# Altium PCB Dental Sensor - V300.PcbDoc
Units mm, origin at the board's own origin, x right, y up, seen from the top; angles counter-clockwise.
Board outline 53.99 x 13.5 mm, 2 copper layers (Top Layer, Bottom Layer), stack 0.287 mm thick; 15 components, 16 nets, 99 pads, 55 vias.
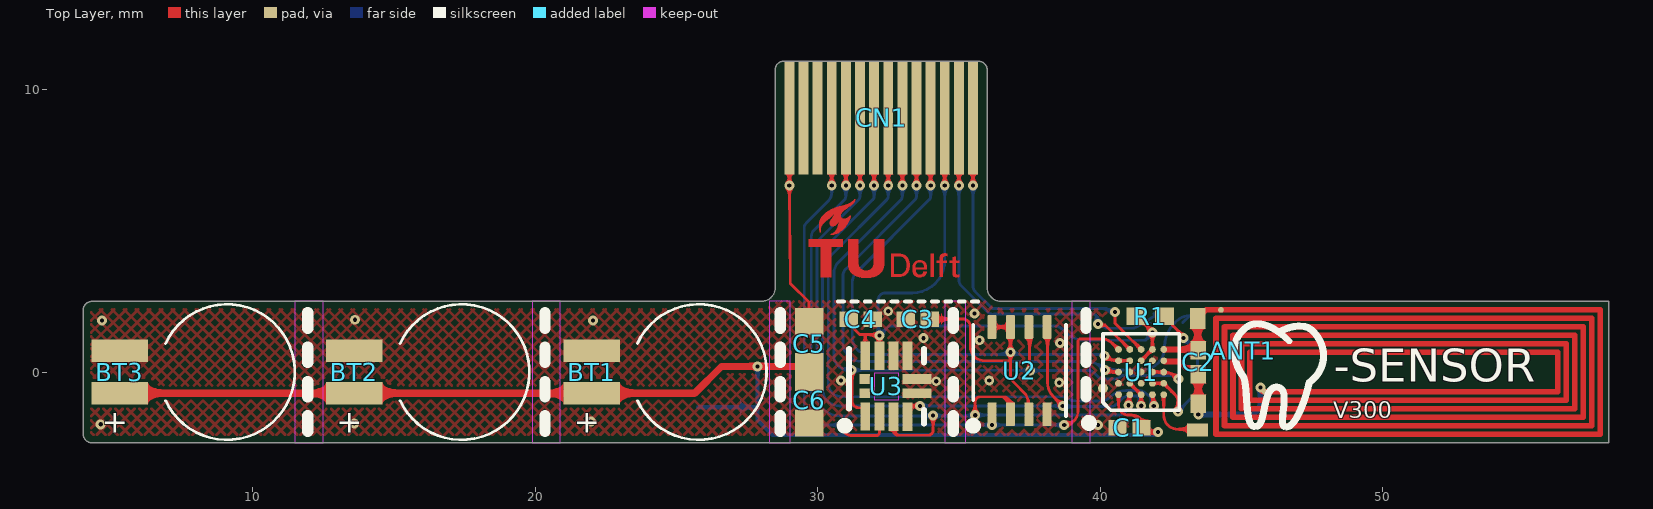
[diagram p0: Top Layer view]
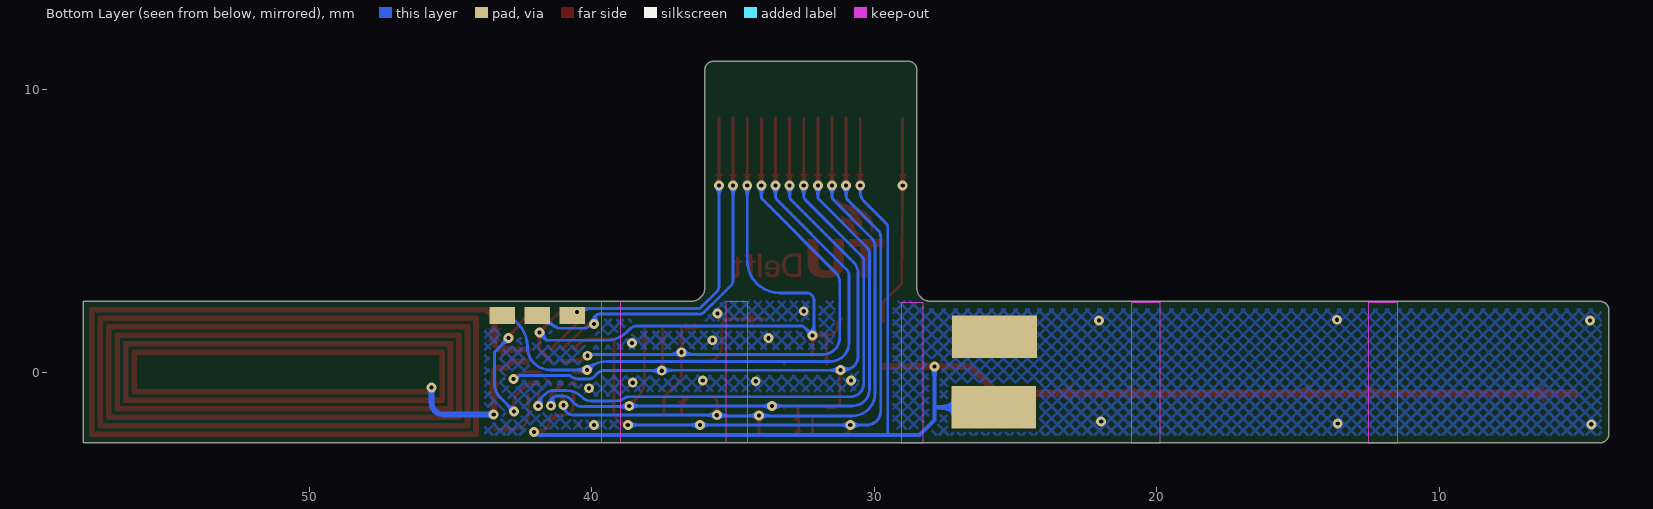
[diagram p1: Bottom Layer view, seen from below]

## Layer stack, top to bottom
Flex Stack Top Coverlay: solder mask 0.05, FC-001, Dk 4
Top Layer: signal copper 0.018
Core: core 0.051, Core-025, Dk 4.6
Bottom Layer: signal copper 0.018
Flex Stack Bottom Coverlay: solder mask 0.05, FC-001, Dk 4
Stiffener 1: core 0.2, Core-009, Dk 4.5

## Board outline
4.3,-2.5 cw(c4.309,-2.2) 4.009,-2.191 4.009,2.191 cw(c4.309,2.2) 4.3,2.5 28,2.5 ccw(c28,3) 28.5,3 28.5,10.709 cw(c28.8,10.7) 28.809,11 35.709,11 cw(c35.7,10.7) 36,10.691 36,3 ccw(c36.5,3) 36.5,2.5 58,2.5 58,-2.5

## Design rules (kind name [scope] priority, off if disabled: settings)
BoardOutlineClearance "Edge Connector" [HasFootprint('52745-1297') or HasFootprint('52745-1497') or HasFootprint('52745-1697')] p1: gap=0 ignorepadtopadclearanceinfootprint=FALSE
BoardOutlineClearance [All] p2: gap=0.2 ignorepadtopadclearanceinfootprint=FALSE
Clearance Clearance_Testpad [InComponent('TP*')] p1: gap=0.1 ignorepadtopadclearanceinfootprint=FALSE except(0.06: Arc-SMDPad Track-SMDPad SMDPad-SMDPad)
Clearance [All] p2: gap=0.1 ignorepadtopadclearanceinfootprint=FALSE
ComponentClearance [InComponent('TP*')] p1: gap=0 collisioncheckmode=3 verticalgap=0.15 showdistances=FALSE
ComponentClearance ComponentClearance_1 [All] p2: gap=0.15 collisioncheckmode=3 verticalgap=0.15 showdistances=FALSE
DiffPairsRouting [All] p1: maxlimit=0.254 minlimit=0.254 mostfreqgap=0.254 toplayer_minwidth=0.381 toplayer_maxwidth=0.381 toplayer_prefwidth=0.381 bottomlayer_minwidth=0.381 bottomlayer_maxwidth=0.381 bottomlayer_prefwidth=0.381 substack1={9C96DA8B-F9AD-4D0B-9D00-B80C23C507E5} toplayer_{9c96da8b-f9ad-4d0b-9d00-b80c23c507e5}_minwidth=0.381 toplayer_{9c96da8b-f9ad-4d0b-9d00-b80c23c507e5}_maxwidth=0.381 toplayer_{9c96da8b-f9ad-4d0b-9d00-b80c23c507e5}_prefwidth=0.381 bottomlayer_{9c96da8b-f9ad-4d0b-9d00-b80c23c507e5}_minwidth=0.381 bottomlayer_{9c96da8b-f9ad-4d0b-9d00-b80c23c507e5}_maxwidth=0.381 bottomlayer_{9c96da8b-f9ad-4d0b-9d00-b80c23c507e5}_prefwidth=0.381 maxuncoupledlength=12.7
HoleSize [All] p1: absolutevalues=TRUE maxlimit=2.54 minlimit=0.15 maxpercent=80.000 minpercent=20.000
MinimumAnnularRing [All] p1: minimumring=0.1
MinimumSolderMaskSliver BGA [HasFootprint('WLCSP25')] p1: minsoldermaskwidth=0.06
MinimumSolderMaskSliver [All] p2: minsoldermaskwidth=0.09
PolygonConnect [All] p1: connectstyle=Direct reliefconductorwidth=0.254 reliefentries=4 polygonreliefangle="90 Angle" airgapwidth=0.1
RoutingVias [All] p1: holewidth=0.15 width=0.35 viastyle="Through Hole" minholewidth=0.15 minwidth=0.35 maxholewidth=1 maxwidth=2
SilkToSolderMaskClearance [IsPad] p1: minsilkscreentomaskgap=0.2 clearancetoexposedcopper=TRUE
SolderMaskExpansion [All] p1: expansion=0.102 istentingtop=FALSE
UnRoutedNet [All] p1: checkbadconnections=TRUE
Width [All] p1: maxlimit=1 minlimit=0.06 preferedwidth=0.15 substack1={9C96DA8B-F9AD-4D0B-9D00-B80C23C507E5} minimp=50.000000 maximp=50.000000 favimp=50.000000
24 further rules are at their usual default settings.

## Components (designator, comment, footprint, x,y, rotation, side; value= is the part's Value field where it differs from the comment)
ANT1 "Antenna" "NFC Antenna" 50.775,-0.1 r0 top net-tie
BT1 "MS414GE-FL26E" MS414GE-FL26E 25.8,0 r180 top
BT2 "MS414GE-FL26E" MS414GE-FL26E 17.4,0 r180 top
BT3 "MS414GE-FL26E" MS414GE-FL26E 9.1,0 r180 top
C1 "0.10µF" RESC1005X03N 41.04,-1.975 r180 top
C2 "300pF" RESC1005X03N 43.475,0.35 r90 top
C3 "0.10µF" RESC1005X03N 33.55,1.875 r180 top
C4 "0.10µF" RESC1005X03N 31.525,1.875 r0 top
C5 "47µF" CAPC1608X12N 29.7,1 r90 top
C6 "47µF" CAPC1608X12N 29.7,-1 r270 top
CN1 "FPC Connector" 52745-1497 32.25,9 r270 top locked
R1 "47k" CAPC1005X03N 41.775,1.975 r0 top
U1 "NHS3152UK" WLCSP25 41.45,0 r90 top
U2 "CY15B104QI-20LPXC" 8-GQFN 37.15,0.05 r90 top
U3 "LIS2DW12TR" FP-LGA12-DM00170568-MFG 32.437,-0.5 r90 top

## Footprints (in the part's own frame and the unit in brackets; to place one, negate y for a bottom-side part, rotate by r counter-clockwise, add the part's x,y. Pads: shape width x height; smd on the part's side, far side on the other; paste and mask are expansions set on the pad)
8-GQFN [mm] "8-pin GQFN (3.23 × 3.28 × 0.55 mm)"
  rrect25% 0.84x0.32 smd: 1(-1.545,0.975) 2(-1.545,0.325) 3(-1.545,-0.325) 4(-1.545,-0.975) 5(1.545,-0.975) 6(1.545,-0.325) 7(1.545,0.325) 8(1.545,0.975)
  silkscreen extent -1.62,-1.64 1.62,1.64, body extent -1.62,-1.69 1.62,1.69, height 0.6
52745-1497 [mm] "Cable Side"
  rect 4x0.35 smd paste-2: 1(0,-3.25) 2(0,-2.75) 3(0,-2.25) 4(0,-1.75) 5(0,-1.25) 6(0,-0.75) 7(0,-0.25) 8(0,0.25) 9(0,0.75) 10(0,1.25) 11(0,1.75) 12(0,2.25) 13(0,2.75) 14(0,3.25)
CAPC1005X03N [mm] "Chip Capacitor, 2-Leads, Body 1,00x0,50mm, IPC Medium Density"
  rect 0.68x0.62 smd: 1(-0.5,0) 2(0.5,0)
  body extent -0.55,-0.28 0.55,0.27, height 0.3
CAPC1608X12N [mm] "Chip Capacitor, 2-Leads, Body 1,60x0,80mm, IPC Medium Density"
  rect 0.95x1 smd: 1(-0.8,0) 2(0.8,0)
  body extent -0.9,-0.5 0.9,0.5, height 1.2
FP-LGA12-DM00170568-MFG [mm]
  rect 0.375x0.35 smd paste+0 mask+0: 1(-0.763,0.75) 2(-0.763,0.25) 3(-0.763,-0.25) 4(-0.763,-0.75) 7(0.763,-0.75) 8(0.763,-0.25) 9(0.763,0.25) 10(0.763,0.75)
  rect 0.35x0.375 smd paste+0 mask+0: 5(-0.25,-0.763) 6(0.25,-0.763) 11(0.25,0.763) 12(-0.25,0.763)
  silkscreen extent -0.8,1.33 1.33,1.33, body extent -1.55,-1.55 1.55,1.55, height 0.25
MS414GE-FL26E [mm] "Rechargeable Battery, 3 V, Lithium, 2 mAh, Button Cell, PCB Pins, 4.8 mm"
  rect 2x0.8 smd: NEG(3.8,-0.75) POS(3.8,0.75)
  silkscreen extent -2.4,-2.4 2.18,2.4, body extent -2.4,-2.4 2.4,2.4, height 1.65
"NFC Antenna" [mm] "4.5 x 15 mm"
  round 0.2 smd paste-2 mask+0.102: 1(-6.5,2.3) 2(-4.95,-0.6)
  Top Layer lines w0.2: -6.5,2.3 6.925,2.3 6.925,-2.1 -6.675,-2.1 -6.675,2 6.625,2 6.625,-1.8 -6.375,-1.8 -6.375,1.7 6.325,1.7 6.325,-1.5 -6.075,-1.5 -6.075,1.4 6.025,1.4 6.025,-1.175 ; -4.95,-0.6 5.425,-0.6 5.425,0.8 -5.475,0.8 -5.475,-0.9 5.725,-0.9 5.725,1.1 -5.775,1.1 -5.775,-1.2 6.025,-1.2
RESC1005X03N [mm] "Chip Resistor, 2-Leads, Body 1,00x0,50mm, IPC Medium Density"
  rect 0.65x0.55 smd: 1(-0.425,0) 2(0.425,0)
  body extent -0.55,-0.27 0.55,0.28, height 0.3
WLCSP25 [mm]
  round 0.24 smd paste+0.018 mask+0.04: A1(-0.8,0.8) A2(-0.4,0.8) A3(0,0.8) A4(0.4,0.8) A5(0.8,0.8) B1(-0.8,0.4) B2(-0.4,0.4) B3(0,0.4) B4(0.4,0.4) B5(0.8,0.4) C1(-0.8,0) C2(-0.4,0) C3(0,0) C4(0.4,0) C5(0.8,0) D1(-0.8,-0.4) D2(-0.4,-0.4) D3(0,-0.4) D4(0.4,-0.4) D5(0.8,-0.4) E1(-0.8,-0.8) E2(-0.4,-0.8) E3(0,-0.8) E4(0.4,-0.8) E5(0.8,-0.8)
  silkscreen extent -1.35,-1.35 1.35,1.35, body extent -1.27,-1.27 1.27,1.27, height 0.54

## Part data
ANT1: library part "NFC Antenna", "Track 0.2; Gap 0.1; Height 4.6; Width 14.5;"
BT1 BT2 BT3: "Coin, 4.8mm 3V Lithium Battery Rechargeable (Secondary) 2mAh", Package="Custom Package Seiko", Availability=Unavailable, MF=Seiko, Mouser-Purchase-URL=https://snapeda.com/shop?store=Mouser&id=554618, MP=MS414GE-FL26E, Price=None, SnapEDA_Link=https://www.snapeda.com/parts/MS414GE-FL26E/Seiko/view-part/554618/?ref=snap
C1 C3 C4: library part GRM155R60J104KA01D, "CAP CER 0.1UF 6.3V X5R 0402", Digi-Key Part Number=490-6287-1-ND, Manufacturer="Murata Electronics North America", Operating Temperature="-55°C ~ 85°C", Package / Case="0402 (1005 Metric)", Ratings=-, Temperature Coefficient=X5R, Tolerance=±10%, Voltage=6.3V, @ qty=0, Applications="General Purpose", Datasheets=http://www.murata.com/~/media/webrenewal/support/library/catalog/products/capacitor/mlcc/c02e.pdf, Factory Stock=0, Features=-, Height - Seated (Max)=-, Image=//media.digikey.com/Renders/Murata%20Renders/ZRB-SERIES-0402.jpg, Lead Spacing=-, Minimum Quantity=1, Mounting Type="Surface Mount, MLCC", Packaging="Cut Tape (CT)", Part Number=GRM155R60J104KA01D, Part Status=Active, Quantity Available=356062, Series=GRM, Size / Dimension="0.039\" L x 0.020\" W (1.00mm x 0.50mm)", Thickness (Max)="0.022\" (0.55mm)", Unit Price (USD)=0.1
C2: library part GRM1555C1H301JA01D, "CAP CER 300PF 50V NP0 0402", Digi-Key Part Number=490-3234-1-ND, Manufacturer="Murata Electronics North America", Operating Temperature="-55°C ~ 125°C", Package / Case="0402 (1005 Metric)", Ratings=-, Temperature Coefficient="C0G, NP0", Tolerance=±5%, Voltage=50V, @ qty=0, Applications="General Purpose", Datasheets=http://www.murata.com/~/media/webrenewal/support/library/catalog/products/capacitor/mlcc/c02e.pdf, Factory Stock=0, Features=-, Height - Seated (Max)=-, Image=//media.digikey.com/Renders/Murata%20Renders/ZRB-SERIES-0402.jpg, Lead Spacing=-, Lead Style=-, Minimum Quantity=1, Mounting Type="Surface Mount, MLCC", Packaging="Cut Tape (CT)", Part Number=GRM1555C1H301JA01D, Part Status=Active, Quantity Available=73694, Series=GRM, Size / Dimension="0.039\" L x 0.020\" W (1.00mm x 0.50mm)", Thickness (Max)="0.022\" (0.55mm)", Unit Price (USD)=0.1
C5 C6: library part GRJ155R60J106ME11D, "CAP CER 47UF 6.3V X5R 0603", Digi-Key Part Number=490-13211-1-ND, Manufacturer="Murata Electronics North America", Operating Temperature="-55°C ~ 85°C", Package / Case=0603, Ratings=-, Temperature Coefficient=X5R, Tolerance=±20%, Voltage=6.3V, @ qty=0, Applications="Boardflex Sensitive", Datasheets=http://psearch.en.murata.com/capacitor/product/GRJ155R60J106ME11%23.pdf, Factory Stock=0, Features="Derating Recommended, Soft Termination", Height - Seated (Max)=-, Image=//media.digikey.com/Renders/Murata%20Renders/ZRB-SERIES-0402.jpg, Lead Spacing=-, Lead Style=-, Minimum Quantity=1, Mounting Type="Surface Mount, MLCC", Packaging="Cut Tape (CT)", Part Number=GRJ155R60J106ME11D, Part Status=Active, Quantity Available=64064, Series=GRJ, Size / Dimension="0.039\" L x 0.020\" W (1.00mm x 0.50mm)", Thickness (Max)="0.028\" (0.70mm)", Unit Price (USD)=0.23
CN1: library part 52745-1497, "FFC / FPC Board Connector, 0.5 mm, 14 Contacts, Receptacle, Easy-On 52745, Surface Mount, Top"
R1: library part ERJ-2RKF4702X, "RES SMD 47K OHM 1% 1/10W 0402", Digi-Key Part Number=P47.0KLCT-ND, Manufacturer="Panasonic Electronic Components", Operating Temperature="-55°C ~ 155°C", Package / Case="0402 (1005 Metric)", Power (Watts)="0.1W, 1/10W", Supplier Device Package=0402, Temperature Coefficient=±100ppm/°C, Tolerance=±1%, @ qty=1500, Composition="Thick Film", Datasheets=http://industrial.panasonic.com/www-cgi/jvcr13pz.cgi?E+PZ+3+AOA0002+ERJ2RKF4702X+7+WW, Factory Stock=0, Failure Rate=-, Features="Automotive AEC-Q200", Height - Seated (Max)="0.016\" (0.40mm)", Image=//media.digikey.com/Photos/Panasonic%20Photos/ERJ-PA2-Series.jpg, Minimum Quantity=1, Number of Terminations=2, Packaging="Cut Tape (CT)", Part Number=ERJ-2RKF4702X, Part Status=Active, Quantity Available=230515, Series=ERJ, Size / Dimension="0.039\" L x 0.020\" W (1.00mm x 0.50mm)", Unit Price (USD)=0.00496
U1: "ARM-microcontrollers - MCU NTAG NHS3152 NFC"
U2: "FRAM (Ferroelectric RAM) Memory IC 4Mbit SPI 20 MHz 8-GQFN (3.23x3.28)"
U3: library part CMP-12175-000006-1, "ACCEL 2-16G I2C/SPI 12LGA", Manufacturer=STMicroelectronics, Max Supply Voltage=3.6V, Min Supply Voltage=1.62V, Operating Supply Current=0.38-90uA, Package=LGA12-DM00170568, Temperature="-40°C to +85°C", Temperature Range High=+85°C, Temperature Range Low=-40°C, Accel Range=2/4/8/16g, Accel Resolution=14bits, Automotive=No, Category=IC, ComponentLink2Description=Datasheet, ComponentLink2URL=https://www.st.com/resource/en/datasheet/lis2dw12.pdf, Device Class L1=Sensors, Device Class L2="Motion Sensors", Device Class L3=Accelerometers, Digikey Description="ACCEL 2-16G I2C/SPI 12LGA", Footprint Url=https://www.st.com/content/ccc/resource/technical/document/technical_note/73/17/9c/16/dd/96/4a/01/CD00134799.pdf/files/CD00134799.pdf/jcr:content/translations/en.CD00134799.pdf, Height=0.7mm, Lead Free=Yes, Manufacturer Part Number=LIS2DW12TR, Mouser Description="Accelerometer Triple ±2g/±4g/±8g/±16g 1.62V to 3.6V 0.244mg/digit/0.488mg/digit/0.976mg/digit/1.952mg/digit 12-Pin LG...", Octopart=https://octopart.com/lis2dw12tr-stmicroelectronics-77080925, RoHS=TRUE, Sensor Output=I2C,SPI

## Free pads (board coordinates)
  rect 0.35x1 smd paste-1 mask+0: 1(31.687,-1.575) 1(31.687,0.588) 1(32.187,-1.575) 1(32.187,0.588) 1(32.687,-1.587) 1(32.687,0.588) 1(33.188,-1.587) 1(33.188,0.588)
  rect 1x0.35 smd paste-1 mask+0: 1(33.525,-0.75) 1(33.525,-0.25)
  rect 0.75x0.45 smd paste-1: 3(43.45,-2.05)
  rect 0.55x0.75 smd paste-1: 3(43.45,1.9)
  rect 0.55x0.65 smd paste-1: 3(43.475,-1.125)
  rect 3x1.5 smd far side paste-10: 4(25.75,1.25) 4(25.775,-1.25)
  rect 0.9x0.6 smd far side: 5(40.7,2) 5(41.937,2) 5(43.175,2)

## Via types
v1: diameter 0.35, hole 0.15, Top Layer to Bottom Layer, tented both sides, 55 vias

## Nets (pads, with @x,y where several pads share a name; then routed paths per layer and width w, separated by ;. In a path a pad name is that pad's centre, name@x,y a point inside that pad or via, vN(x,y) a via of type N, cw(c..) or ccw(c..) an arc to the next point about the centre after c; other vN are vias at no path point)
AN0_0: pad.3@43.45,-2.05 U1.E1 | length 2.2
  Top Layer w0.1: U1.E1 42.25,-1.525 ccw(c42.75,-1.525) 42.75,-2.025 43.425,-2.025 cw(c43.425,-2.05) pad.3@43.45,-2.05
CS: CN1.5 pad.1@32.187,-1.575 U1.A5 U2.1 U3.2 | length 27.2
  Top Layer w0.1: v1(30.85,-1.875) 30.85,-1.887 ccw(c31.213,-1.887) 31.213,-2.25 32.075,-2.25 ccw(c32.075,-2.137) 32.187,-2.137 pad.1@32.187,-1.575 ; v1(31,6.6) CN1.5 ; v1(38.725,-1.875) ccw(c38.725,-1.389) 39.211,-1.389 39.211,-1.381 39.211,1.116 39.241,1.146 39.27,1.175 40.05,1.175 cw(c40.05,0.632) 40.434,1.016 U1.A5 U1.A5@40.65,0.81
  Bottom Layer w0.1: 29.863,5.013 ccw(c30.077,4.8) 29.775,4.8 29.775,-1.377 ccw(c30.273,-1.377) 30.273,-1.875 v1(30.85,-1.875) v1(36.175,-1.875) v1(38.725,-1.875) ; 29.863,5.013 30.947,6.097 ccw(c30.819,6.225) 31,6.225 v1(31,6.6)
GND: BT1.NEG BT2.NEG BT3.NEG C1.2 C3.2 C4.2 C5.2 C6.2 CN1.1 pad.1@32.687,0.588 pad.1@33.188,0.588 pad.1@33.525,-0.25 pad.1@33.525,-0.75 pad.4@25.75,1.25 U1.A2 U1.B3 U1.C3 U1.D4 U2.4 U3.5 U3.6 U3.7 U3.8 | length 7.7
  Top Layer w0.1: CN1.1 v1(29,6.6) 29.034,3.131 29.693,2.484 C5.2 ; pad.1@33.175,0.275 U3.7 ; C1.2@40.425,-1.875 40.45,-1.85 C1.2@40.45,-1.8
  Top Layer w0.2: v1@40.1,-0.6 v1@40.125,-0.575 ; v1(40.1,-0.575) v1@40.125,-0.575 ; v1@40.141,-0.575 v1@40.125,-0.575 ; v1@40.15,-0.55 v1@40.125,-0.575 ; U1.A2@40.632,-0.408 U1.A2@40.639,-0.4
  other v1: 39.925,-1.875 4.625,-1.85 13.6,-1.825 21.975,-1.75 38.55,-0.375 34.2,-0.325 30.825,-0.3 36.075,-0.3 38.575,1.025 35.725,1.125 33.75,1.2 4.675,1.825 22.05,1.825 13.625,1.85 35.55,2.075 32.5,2.15
MISO: CN1.6 pad.1@32.687,-1.587 U1.B1 U2.2 U3.3 | length 27.8
  Top Layer w0.1: v1(31.5,6.6) CN1.6 ; U3.3 32.7,-1.275 pad.1@32.7,-1.587 ; pad.1@32.787,-1.687 32.687,-1.587 32.687,-2.076 ccw(c32.849,-2.076) 32.849,-2.237 33.912,-2.237 ccw(c33.912,-2.062) 34.088,-2.062 v1(34.088,-1.537) ; v1(35.575,-1.525) 35.575,-1.054 cw(c35.754,-1.054) 35.754,-0.875 36.55,-0.875 cw(c36.55,-1.15) 36.825,-1.15 U2.2 ; v1(41,-1.175) 41.025,-1.15 41.025,-0.825 U1.B1
  Bottom Layer w0.1: v1(31.5,6.6) 31.5,6.225 cw(c31.319,6.225) 31.447,6.097 30.116,4.766 ccw(c30.458,4.425) 29.975,4.425 29.975,-0.75 ccw(c30.775,-0.75) 30.775,-1.55 35.55,-1.55 v1(35.575,-1.525) 40.65,-1.525 ccw(c40.65,-1.175) v1(41,-1.175)
MOSI: CN1.7 pad.1@33.188,-1.587 U1.B2 U1.C1 U2.5 U3.4 | length 26.8
  Top Layer w0.1: v1(32,6.6) CN1.7 ; U3.4 33.188,-1.275 33.262,-1.2 v1(33.625,-1.2) ; U2.5 38.138,1.583 38.138,-0.375 ccw(c38.832,-0.375) 38.341,-0.866 v1(38.675,-1.2) ; U1.B2@41.023,-0.373 U1.C1 v1(41.45,-1.194)
  Bottom Layer w0.1: v1(32,6.6) 32,6.225 cw(c31.819,6.225) 31.947,6.097 30.263,4.413 ccw(c30.477,4.2) 30.175,4.2 30.175,-0.6 ccw(c30.775,-0.6) 30.775,-1.2 v1(38.675,-1.2) 38.7,-1.225 40.35,-1.225 ccw(c40.35,-0.885) 40.59,-1.125 40.783,-0.933 40.796,-0.922 cw(c41,-1.175) 41,-0.85 41.25,-0.85 cw(c41.25,-1.05) 41.45,-1.05 v1(41.45,-1.194)
NetANT1_1: ANT1.1 C2.2 pad.3@43.45,1.9 U1.E5 | length 3.1
  Top Layer w0.2: U1.E5 43.275,0.8 43.45,0.975 43.45,1.9 43.75,2.2 ANT1.1
NetANT1_2: ANT1.2 C2.1 pad.3@43.475,-1.125 U1.E4 | length 6
  Top Layer w0.2: U1.E4@42.287,0.375 42.8,0.375 43.017,0.158 43.367,0.158 C2.1@43.475,0.05 ; v1(43.475,-1.5) C2.1@43.475,-0.025 ; v1(45.675,-0.55) ccw(c45.825,-0.55) ANT1.2
  Bottom Layer w0.2: v1(43.475,-1.5) 45.258,-1.5 ccw(c45.258,-1.083) 45.675,-1.083 v1(45.675,-0.55)
PRE_CHARGE: R1.2 U1.D2 U1.E2 | length 5.7
  Top Layer w0.1: U1.D2 U1.E2 42.638,-0.787 cw(c42.366,-1.059) 42.75,-1.059 v1(42.75,-1.4) ; R1.2 42.305,1.975 42.565,1.715 42.565,1.654 42.946,1.273 v1(42.946,1.205)
  Bottom Layer w0.1: v1(42.75,-1.4) 43.238,-0.912 ccw(c42.726,-0.4) 43.45,-0.4 43.45,0.701 v1(42.946,1.205)
RESET: CN1.10 pad.5@43.175,2 U1.A3 | length 23.8
  Top Layer w0.1: v1(33.5,6.6) CN1.10 ; v1(40.175,0.075) 40.243,0.075 40.318,0 U1.A3
  Bottom Layer w0.1: v1(33.5,6.6) 33.5,6.225 cw(c33.319,6.225) 33.447,6.097 30.999,3.649 ccw(c31.237,3.41) 30.9,3.41 30.9,1.025 ccw(c31.55,1.025) 31.55,0.375 39.5,0.375 cw(c39.5,-0.53) 40.14,0.11 v1(40.175,0.075) 41.475,0.075 ccw(c41.475,0.881) 42.281,0.881 42.281,0.895 cw(c43.455,0.895) 42.625,1.725 42.706,1.806 cw(c43.175,1.336) 43.175,2 pad.5@42.925,1.75
SCLK: CN1.9 pad.1@31.687,-1.575 U1.C2 U1.D3 U1.E3 U2.6 U3.1 | length 26.9
  Top Layer w0.1: v1(31.2,0.075) 31.225,0.05 31.225,-1.037 ccw(c31.45,-1.037) 31.45,-1.262 U3.1 ; v1(33,6.6) CN1.9 ; U2.6 37.5,1.57 37.5,0.075 v1(37.525,0.05) ; U1.C2 41.468,-0.4 41.85,-0.018 U1.D3 ; U1.D3@41.854,0 U1.E3 cw(c42.25,-0.664) 42.719,-0.194 v1(42.775,-0.25)
  Bottom Layer w0.1: v1(33,6.6) 33,6.225 cw(c32.819,6.225) 32.947,6.097 30.681,3.831 30.575,3.575 30.575,0.566 ccw(c31.066,0.566) 31.066,0.075 v1(31.2,0.075) 31.212,0.063 37.512,0.063 v1(37.525,0.05) 39.6,0.05 cw(c39.6,-0.191) 39.771,-0.021 39.9,-0.15 ccw(c40.141,0.091) 40.141,-0.25 40.438,-0.25 ccw(c40.438,0.272) 40.776,-0.126 42.584,-0.126 42.707,-0.25 v1(42.775,-0.25)
SWCLK: CN1.13 pad.5@41.937,2 U1.B5 | length 15.3
  Top Layer w0.1: v1(35,6.6) CN1.13 ; v1(39.925,1.7) 39.973,1.652 40.194,1.652 41.046,0.8 U1.B5
  Bottom Layer w0.1: v1(35,6.6) 35,3.25 ccw(c35.26,3.25) 35.076,3.066 35.433,2.709 36.019,2.123 ccw(c36.162,2.263) 36.052,2.096 ccw(c36.215,2.348) 36.25,2.05 39.745,2.05 cw(c39.745,1.87) 39.925,1.87 v1(39.925,1.7) 40.181,1.567 ccw(c40.25,1.7) 40.25,1.55 40.45,1.55 41.125,1.55 41.15,1.55 ccw(c41.15,1.7) 41.225,1.57 41.537,1.75 pad.5@41.937,2 ; v1@39.925,1.663 v1@39.935,1.652 ; pad.5@41.9,2.075 pad.5@41.94,2.001
SWDIO: CN1.14 pad.5@40.7,2 U1.C5 | length 13.1
  Top Layer w0.1: v1(35.5,6.6) CN1.14 ; v1(40.525,2.125) 40.525,1.725 U1.C5
  Bottom Layer w0.1: v1(35.5,6.6) 35.5,3.031 ccw(c35.756,3.031) 35.575,2.85 36.162,2.263 ccw(c36.215,2.348) 36.226,2.249 cw(c36.25,2.05) 36.25,2.25 36.497,2.25 40.107,2.25 40.122,2.25 v1(40.525,2.125) ; v1(40.525,2.125) v1(40.525,2.125) v1(40.525,2.125)
VACC: C4.1 CN1.12 pad.1@31.687,0.588 pad.1@32.187,0.588 R1.1 U1.C4 U1.D5 U3.9 U3.10 | length 24.9
  Top Layer w0.1: C4.1@31.15,1.875 31.312,1.713 31.312,1.5 31.425,1.388 31.425,1.384 31.484,1.325 31.687,1.325 32.153,1.325 v1(32.187,1.29) ; U3.10 31.687,0.588 31.687,1.3 ; pad.1@32.187,0.588 v1@32.187,1.325 ; v1(34.5,6.6) CN1.12 ; R1.1@41.1,2.15 R1.1 ; R1.1@41.375,1.905 41.782,1.498 41.848,1.498 41.85,1.5 U1.D5 U1.C4
  Bottom Layer w0.1: v1(32.187,1.29) 32.14,1.338 32.14,2.54 cw(c32.4,2.54) 32.4,2.8 33.35,2.8 ccw(c33.35,3.95) 34.5,3.95 v1(34.5,6.6) ; v1@32.187,1.325 32.222,1.325 32.523,1.625 38.425,1.625 cw(c38.425,1.323) 38.638,1.537 38.751,1.424 ccw(c39.473,2.147) 39.473,1.125 41.598,1.125 41.85,1.377 v1(41.85,1.403)
VDDBAT: BT1.POS BT2.POS BT3.POS C1.1 C5.1 C6.1 CN1.4 pad.4@25.775,-1.25 U1.A1 | length 57.2
  Top Layer w0.1: v1(30.5,6.6) CN1.4@30.5,9 ; U1.A1 40.65,-1.175 ccw(c41,-1.175) 41,-1.525 41.125,-1.525 cw(c41.125,-1.975) 41.492,-1.715 41.565,-1.943 C1.1@41.575,-1.975
  Top Layer w0.15: C1.1@41.6,-1.975 41.75,-2.125 v1(42.05,-2.125)
  Top Layer w0.25: BT3.POS@5.2,-0.75 BT2.POS BT1.POS 25.65,-0.75 26.6,0.2 v1(27.875,0.2) C5.1
  Bottom Layer w0.1: 29.525,-2.225 29.525,5.1 cw(c29.766,5.1) 29.596,5.271 30.375,6.05 ccw(c30.073,6.352) 30.5,6.352 v1(30.5,6.6)
  Bottom Layer w0.15: pad.4@25.775,-1.25 27.875,-1.25 ; v1(27.875,0.2) 27.875,0.062 27.875,-1.25 ; v1(42.05,-2.125) 41.996,-2.125 41.896,-2.225 28.4,-2.225 27.875,-1.7 27.875,-1.25
VMEM: C3.1 CN1.11 U1.A4 U1.B4 U2.3 U2.7 U2.8 | length 27.3
  Top Layer w0.1: C3.1@33.875,1.875 35.15,1.875 cw(c35.15,1.625) 35.4,1.625 35.4,0.9 ccw(c35.9,0.9) 35.9,0.4 36.825,0.4 ; v1(34,6.6) CN1.11 ; U2.8 U2.7 v1(36.825,0.7) 36.825,0.4 ; U2.3 cw(c37.535,-1.435) 37.45,-1.435 37.45,-1 37.362,-0.787 36.966,-0.391 cw(c37.308,-0.05) 36.825,-0.05 36.825,0.4 ; v1@40.218,0.575 v1(40.15,0.575) ccw(c40.572,0.997) 40.572,0.4 U1.A4 U1.B4
  Bottom Layer w0.1: v1(34,6.6) 34,6.225 cw(c33.819,6.225) 33.947,6.097 31.366,3.516 ccw(c31.708,3.175) 31.225,3.175 31.225,1.225 ccw(c31.825,1.225) 31.825,0.625 v1@36.825,0.625 ; v1(36.825,0.7) v1@36.825,0.625 ; v1(40.15,0.575) 40.102,0.623 39.969,0.623 39.966,0.625 v1@36.825,0.625
WAKE_UP: CN1.8 U1.D1 | length 22.9
  Top Layer w0.1: v1(32.5,6.6) CN1.8 ; U1.D1@41.863,-0.8 41.875,-0.812 41.875,-1.176 v1(41.9,-1.201)
  Bottom Layer w0.1: v1(32.5,6.6) 32.5,6.225 cw(c32.319,6.225) 32.447,6.097 30.456,4.106 ccw(c30.712,3.85) 30.384,4.004 ccw(c30.475,3.962) 30.375,3.962 30.375,-0.4 ccw(c30.85,-0.4) 30.85,-0.875 38.675,-0.875 cw(c38.675,-1.2) 38.841,-0.92 38.956,-0.989 ; 38.956,-0.989 ccw(c39.007,-0.903) 38.996,-1.002 39.225,-1.025 40.012,-1.025 ccw(c40.012,-0.548) 40.35,-0.885 cw(c40.918,-1.453) 40.918,-0.65 41.325,-0.65 cw(c41.325,-1.133) 41.666,-0.791 41.776,-0.901 cw(c41.475,-1.201) v1(41.9,-1.201) v1@41.9,-1.184
pads on no net: CN1.2 CN1.3 U3.11 U3.12

## Polygon pours and split planes (outlines as drawn)
no net on Layer0 "Default Coverlay 1 Top" (split plane): 4.3,-2.5 4.24,-2.498 4.132,-2.449 4.05,-2.362 4.007,-2.251 4.009,-2.191 4.009,2.191 4.007,2.251 4.05,2.362 4.132,2.449 4.24,2.498 4.3,2.5 28,2.5 28.098,2.51 28.278,2.584 28.416,2.722 28.49,2.902 28.5,3 28.5,10.709 28.502,10.769 28.551,10.878 28.638,10.959 28.749,11.002 28.809,11 35.709,11 35.769,10.998 35.878,10.949 35.959,10.862 36.002,10.751 36,10.691 36,3 36.01,2.902 36.084,2.722 36.222,2.584 36.402,2.51 36.5,2.5 58,2.5 58,-2.5
no net on Layer0 "Default Coverlay 1 Bottom" (split plane): 4.3,-2.5 4.24,-2.498 4.132,-2.449 4.05,-2.362 4.007,-2.251 4.009,-2.191 4.009,2.191 4.007,2.251 4.05,2.362 4.132,2.449 4.24,2.498 4.3,2.5 28,2.5 28.098,2.51 28.278,2.584 28.416,2.722 28.49,2.902 28.5,3 28.5,10.709 28.502,10.769 28.551,10.878 28.638,10.959 28.749,11.002 28.809,11 35.709,11 35.769,10.998 35.878,10.949 35.959,10.862 36.002,10.751 36,10.691 36,3 36.01,2.902 36.084,2.722 36.222,2.584 36.402,2.51 36.5,2.5 58,2.5 58,-2.5
GND on Top Layer "Top ground" (hatched 45Degree grid 0.3 track 0.1, remove dead copper, pour order 1): 15.773,2.5 43.775,2.5 43.775,-2.5 15.773,-2.502 4.009,-2.5 4.009,2.5
GND on Bottom Layer "Bottom Ground" (hatched 45Degree grid 0.3 track 0.1, remove dead copper, pour order 3): 4.009,2.5 43.775,2.5 43.775,-2.5 4.009,-2.503

## Keep-outs
Top Layer:
  rectangle: 11.5,-2.5 12.5,2.5
  rectangle: 39,-2.5 39.65,2.5
  rectangle: 34.5,-2.5 35.25,2.5
  rectangle: 19.9,-2.5 20.9,2.5
  rectangle: 28.289,-2.5 29.039,2.5
  rectangle: 32,-0.975 32.875,-0.05
Bottom Layer:
  rectangle: 28.289,-2.525 29.039,2.475
  rectangle: 19.9,-2.525 20.9,2.475
  rectangle: 11.5,-2.525 12.5,2.475
  rectangle: 34.5,-2.5 35.25,2.5
  rectangle: 39,-2.5 39.65,2.5

## Other copper
Top Layer:
  region: 34.887,4.079 34.887,3.938 34.89,3.938 34.89,3.935 35.019,3.935 35.019,3.864 35.016,3.864 35.016,3.861 34.887,3.861 34.887,3.491 34.89,3.491 34.89,3.477 34.893,3.477 34.893,3.471 34.895,3.471 34.895,3.468 34.898,3.468 34.898,3.462 34.901,3.462 34.901,3.46 34.904,3.46 34.904,3.457 34.91,3.457 34.91,3.454 34.913,3.454 34.913,3.451 34.918,3.451 34.918,3.448 34.924,3.448 34.924,3.445 34.936,3.445 34.936,3.442 34.953,3.442 34.953,3.44 34.961,3.44 34.961,3.442 34.99,3.442 34.99,3.445 35.004,3.445 35.004,3.448 35.013,3.448 35.013,3.365 35.002,3.365 35.002,3.362 34.979,3.362 34.979,3.359 34.898,3.359 34.898,3.362 34.875,3.362 34.875,3.365 34.864,3.365 34.864,3.368 34.852,3.368 34.852,3.371 34.844,3.371 34.844,3.374 34.838,3.374 34.838,3.376 34.832,3.376 34.832,3.379 34.827,3.379 34.827,3.382 34.821,3.382 34.821,3.385 34.818,3.385 34.818,3.388 34.812,3.388 34.812,3.391 34.81,3.391 34.81,3.394 34.807,3.394 34.807,3.397 34.804,3.397 34.804,3.402 34.801,3.402 34.801,3.405 34.798,3.405 34.798,3.411 34.795,3.411 34.795,3.414 34.792,3.414 34.792,3.419 34.789,3.419 34.789,3.428 34.787,3.428 34.787,3.437 34.784,3.437 34.784,3.454 34.781,3.454 34.781,3.858 34.778,3.858 34.778,3.861 34.683,3.861 34.683,3.935 34.778,3.935 34.778,3.938 34.781,3.938 34.781,4.056 34.787,4.056 34.787,4.059 34.795,4.059 34.795,4.061 34.804,4.061 34.804,4.064 34.812,4.064 34.812,4.067 34.824,4.067 34.824,4.07 34.832,4.07 34.832,4.073 34.841,4.073 34.841,4.076 34.85,4.076 34.85,4.079 34.858,4.079 34.858,4.081 34.87,4.081 34.87,4.084 34.878,4.084 34.878,4.087 34.887,4.087 34.887,4.081
  region: 301 vertices and 1 holes, not listed, extent 32.597,3.376 33.257,4.182
  region: 495 vertices and 1 holes, not listed, extent 33.36,3.359 33.867,3.952
  region: 33.996,4.139 33.996,4.182 34.102,4.182 34.102,3.376 33.996,3.376 33.996,4.136
  region: 34.325,3.422 34.325,3.861 34.219,3.861 34.219,3.935 34.323,3.935 34.323,3.938 34.325,3.938 34.325,4.05 34.328,4.05 34.328,4.073 34.331,4.073 34.331,4.087 34.334,4.087 34.334,4.099 34.337,4.099 34.337,4.104 34.34,4.104 34.34,4.113 34.343,4.113 34.343,4.119 34.345,4.119 34.345,4.122 34.348,4.122 34.348,4.127 34.351,4.127 34.351,4.133 34.354,4.133 34.354,4.136 34.357,4.136 34.357,4.142 34.36,4.142 34.36,4.144 34.363,4.144 34.363,4.147 34.366,4.147 34.366,4.15 34.368,4.15 34.368,4.153 34.371,4.153 34.371,4.156 34.374,4.156 34.374,4.159 34.38,4.159 34.38,4.162 34.383,4.162 34.383,4.165 34.386,4.165 34.386,4.167 34.391,4.167 34.391,4.17 34.394,4.17 34.394,4.173 34.4,4.173 34.4,4.176 34.406,4.176 34.406,4.179 34.411,4.179 34.411,4.182 34.42,4.182 34.42,4.185 34.426,4.185 34.426,4.187 34.434,4.187 34.434,4.19 34.446,4.19 34.446,4.193 34.457,4.193 34.457,4.196 34.543,4.196 34.543,4.193 34.555,4.193 34.555,4.19 34.569,4.19 34.569,4.187 34.578,4.187 34.578,4.185 34.58,4.185 34.58,4.102 34.578,4.102 34.578,4.099 34.546,4.099 34.546,4.102 34.503,4.102 34.503,4.099 34.483,4.099 34.483,4.096 34.472,4.096 34.472,4.093 34.466,4.093 34.466,4.09 34.46,4.09 34.46,4.087 34.454,4.087 34.454,4.084 34.452,4.084 34.452,4.081 34.449,4.081 34.449,4.076 34.446,4.076 34.446,4.073 34.443,4.073 34.443,4.067 34.44,4.067 34.44,4.059 34.437,4.059 34.437,4.047 34.434,4.047 34.434,3.938 34.437,3.938 34.437,3.935 34.563,3.935 34.563,3.861 34.434,3.861 34.434,3.376 34.325,3.376 34.325,3.419
  region: 1200 vertices and 0 holes, not listed, extent 30.051,4.859 31.325,6.118
  region: 30.104,3.904 30.104,4.436 30.099,4.436 30.099,4.441 29.687,4.441 29.687,4.446 29.682,4.446 29.682,4.455 29.687,4.455 29.687,4.69 29.682,4.69 29.682,4.695 29.687,4.695 29.687,4.704 30.894,4.704 30.894,4.441 30.482,4.441 30.482,4.436 30.477,4.436 30.477,3.358 30.104,3.358 30.104,3.9
  region: 396 vertices and 0 holes, not listed, extent 31.076,3.334 32.355,4.699

## Silkscreen, mask and mechanical layers (free items; w line width, h text height)
Flex Stack Top Overlay:
  drawing of 38 lines, arcs and shapes, not listed
  text "-SENSOR" at 48.275,-0.725 h2
  text "V300" at 48.25,-1.825 h1
Flex Stack Top Coverlay:
  drawing of 8 lines, arcs and shapes, not listed
Board Shape:
  lines w0.05: 4.3,2.5 ccw(c4.309,2.2) 4.009,2.191 4.009,-2.191 ccw(c4.309,-2.2) 4.3,-2.5 58,-2.5 58,2.5 ; 4.3,2.5 28,2.5 ccw(c28,3) 28.5,3 28.5,10.709 cw(c28.8,10.7) 28.809,11 35.709,11 cw(c35.7,10.7) 36,10.691 36,3 ccw(c36.5,3) 36.5,2.5 58,2.5 ; 58,2.5 ccw(c58,2.5) 58,2.5 ; 15.775,2.5 ccw(c15.775,2.5) 15.775,2.5
Assembly Notes:
  lines w0.05: 35.3,-2.5 ccw(c35.3,-2.5) 35.3,-2.5 ; 35.3,-2.5 38.85,-2.5 38.85,2.5 35.3,2.5 ; 35.3,-2.5 35.3,2.5 ; 35.3,2.5 ccw(c35.3,2.5) 35.3,2.5 ; 4.009,-2.209 ccw(c4.3,-2.209) 4.3,-2.5 11.55,-2.5 11.55,2.5 4.3,2.5 ccw(c4.3,2.209) 4.009,2.209 4.009,-2.209 ; 12.45,-2.5 12.45,2.5 19.95,2.5 19.95,-2.5 12.45,-2.5 ; 20.85,-2.5 23.95,-2.5 23.95,2.5 20.85,2.5 20.85,-2.5 ; 28.5,3.175 29.1,2.575 29.1,-2.5 34.4,-2.5 34.4,2.5 cw(c34.9,2.5) 34.9,3 ccw(c34.9,4.1) 36,4.1 36,10.691 ccw(c35.7,10.7) 35.709,11 28.809,11 ccw(c28.8,10.7) 28.5,10.709 28.5,3.175 ; 39.85,-2.5 44,-2.5 44,1.425 39.85,1.425 39.85,-2.5 ; 58,2.5 ccw(c58,2.5) 58,2.5

## Text inside footprints (layer, text, board x,y; h text height)
BT1: Flex Stack Top Overlay "+" at 22.3,-1.45 h0.81 r180
BT2: Flex Stack Top Overlay "+" at 13.9,-1.45 h0.81 r180
BT3: Flex Stack Top Overlay "+" at 5.6,-1.45 h0.81 r180